# Altium PCB 载流板Ver0.1.PcbDoc (part 2 of 2)
Units mm, origin at the board's own origin, x right, y up, seen from the top; angles counter-clockwise.
Board outline 106 x 55 mm, 2 copper layers (Top Layer, Bottom Layer), stack 2.04 mm thick; 1 components, 4 nets, 8 pads, 2860 vias.
Unrouted connection lines stored in the file: 7.
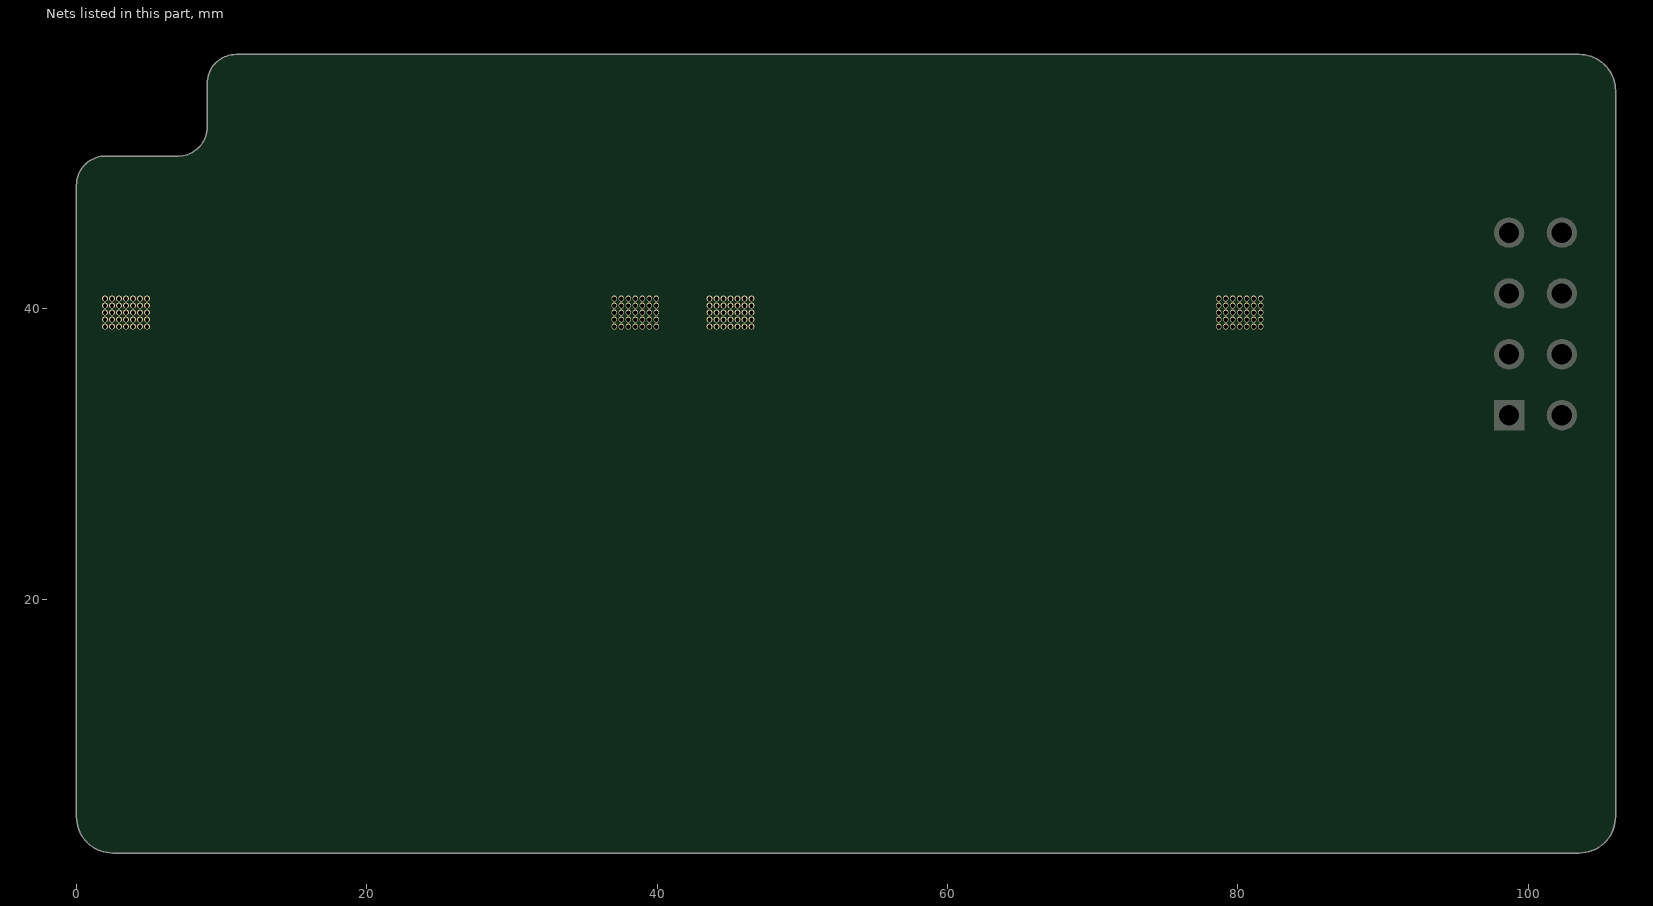
[diagram p2: the nets of this part, all layers, seen from the top]

## Via types
v1: diameter 0.4, hole 0.3, Top Layer to Bottom Layer, tented both sides, 2860 vias

## Nets (pads, with @x,y where several pads share a name; then routed paths per layer and width w, separated by ;. In a path a pad name is that pad's centre, name@x,y a point inside that pad or via, vN(x,y) a via of type N, cw(c..) or ccw(c..) an arc to the next point about the centre after c; other vN are vias at no path point) (continued)
X: 
  other v1: 1.97,38.76 2.453,38.76 2.936,38.76 3.418,38.76 3.901,38.76 4.383,38.76 4.866,38.76 37.048,38.76 37.53,38.76 38.013,38.76 38.496,38.76 38.978,38.76 39.461,38.76 39.943,38.76 43.601,38.76 43.601,38.76 44.084,38.76 44.084,38.76 44.084,38.76 44.084,38.76 44.084,38.76 44.084,38.76 44.566,38.76 44.566,38.76 44.566,38.76 44.566,38.76 44.566,38.76 44.566,38.76 45.049,38.76 45.049,38.76 45.049,38.76 45.049,38.76 45.049,38.76 45.049,38.76 45.531,38.76 45.531,38.76 45.531,38.76 45.531,38.76 45.531,38.76 45.531,38.76 46.014,38.76 46.014,38.76 46.014,38.76 46.014,38.76 46.014,38.76 46.014,38.76 46.497,38.76 46.497,38.76 46.497,38.76 46.497,38.76 78.678,38.76 78.678,38.76 78.678,38.76 78.678,38.76 79.161,38.76 79.161,38.76 79.161,38.76 79.161,38.76 79.161,38.76 79.161,38.76 79.644,38.76 79.644,38.76 79.644,38.76 79.644,38.76 79.644,38.76 79.644,38.76 80.126,38.76 80.126,38.76 80.126,38.76 80.126,38.76 80.126,38.76 80.126,38.76 80.609,38.76 80.609,38.76 80.609,38.76 80.609,38.76 80.609,38.76 80.609,38.76 81.091,38.76 81.091,38.76 81.091,38.76 81.091,38.76 81.091,38.76 81.091,38.76 81.574,38.76 81.574,38.76 1.97,39.243 2.453,39.243 2.936,39.243 3.418,39.243 3.901,39.243 4.383,39.243 4.866,39.243 37.048,39.243 37.53,39.243 38.013,39.243 38.496,39.243 38.978,39.243 39.461,39.243 39.943,39.243 43.601,39.243 43.601,39.243 43.601,39.243 43.601,39.243 44.084,39.243 44.084,39.243 44.084,39.243 44.084,39.243 44.084,39.243 44.084,39.243 44.084,39.243 44.084,39.243 44.084,39.243 44.084,39.243 44.084,39.243 44.084,39.243 44.566,39.243 44.566,39.243 44.566,39.243 44.566,39.243 44.566,39.243 44.566,39.243 44.566,39.243 44.566,39.243 44.566,39.243 44.566,39.243 44.566,39.243 44.566,39.243 45.049,39.243 45.049,39.243 45.049,39.243 45.049,39.243 45.049,39.243 45.049,39.243 45.049,39.243 45.049,39.243 45.049,39.243 45.049,39.243 45.049,39.243 45.049,39.243 45.531,39.243 45.531,39.243 45.531,39.243 45.531,39.243 45.531,39.243 45.531,39.243 45.531,39.243 45.531,39.243 45.531,39.243 45.531,39.243 45.531,39.243 45.531,39.243 46.014,39.243 46.014,39.243 46.014,39.243 46.014,39.243 46.014,39.243 46.014,39.243 46.014,39.243 46.014,39.243 46.014,39.243 46.014,39.243 46.014,39.243 46.014,39.243 46.497,39.243 46.497,39.243 46.497,39.243 46.497,39.243 46.497,39.243 46.497,39.243 46.497,39.243 46.497,39.243 78.678,39.243 78.678,39.243 78.678,39.243 78.678,39.243 78.678,39.243 78.678,39.243 78.678,39.243 78.678,39.243 79.161,39.243 79.161,39.243 79.161,39.243 79.161,39.243 79.161,39.243 79.161,39.243 79.161,39.243 79.161,39.243 79.161,39.243 79.161,39.243 79.161,39.243 79.161,39.243 79.644,39.243 79.644,39.243 79.644,39.243 79.644,39.243 79.644,39.243 79.644,39.243 79.644,39.243 79.644,39.243 79.644,39.243 79.644,39.243 79.644,39.243 79.644,39.243 80.126,39.243 80.126,39.243 80.126,39.243 80.126,39.243 80.126,39.243 80.126,39.243 80.126,39.243 80.126,39.243 80.126,39.243 80.126,39.243 80.126,39.243 80.126,39.243 80.609,39.243 80.609,39.243 80.609,39.243 80.609,39.243 80.609,39.243 80.609,39.243 80.609,39.243 80.609,39.243 80.609,39.243 80.609,39.243 80.609,39.243 80.609,39.243 81.091,39.243 81.091,39.243 81.091,39.243 81.091,39.243 81.091,39.243 81.091,39.243 81.091,39.243 81.091,39.243 81.091,39.243 81.091,39.243 81.091,39.243 81.091,39.243 81.574,39.243 81.574,39.243 81.574,39.243 81.574,39.243 1.97,39.725 2.453,39.725 2.936,39.725 3.418,39.725 3.901,39.725 4.383,39.725 4.866,39.725 37.048,39.725 37.53,39.725 38.013,39.725 38.496,39.725 38.978,39.725 39.461,39.725 39.943,39.725 43.601,39.725 43.601,39.725 43.601,39.725 43.601,39.725 44.084,39.725 44.084,39.725 44.084,39.725 44.084,39.725 44.084,39.725 44.084,39.725 44.084,39.725 44.084,39.725 44.084,39.725 44.084,39.725 44.084,39.725 44.084,39.725 44.566,39.725 44.566,39.725 44.566,39.725 44.566,39.725 44.566,39.725 44.566,39.725 44.566,39.725 44.566,39.725 44.566,39.725 44.566,39.725 44.566,39.725 44.566,39.725 45.049,39.725 45.049,39.725 45.049,39.725 45.049,39.725 45.049,39.725 45.049,39.725 45.049,39.725 45.049,39.725 45.049,39.725 45.049,39.725 45.049,39.725 45.049,39.725 45.531,39.725 45.531,39.725 45.531,39.725 45.531,39.725 45.531,39.725 45.531,39.725 45.531,39.725 45.531,39.725 45.531,39.725 45.531,39.725 45.531,39.725 45.531,39.725 46.014,39.725 46.014,39.725 46.014,39.725 46.014,39.725 46.014,39.725 46.014,39.725 46.014,39.725 46.014,39.725 46.014,39.725 46.014,39.725 46.014,39.725 46.014,39.725 46.497,39.725 46.497,39.725 46.497,39.725 46.497,39.725 46.497,39.725 46.497,39.725 46.497,39.725 46.497,39.725 78.678,39.725 78.678,39.725 78.678,39.725 78.678,39.725 78.678,39.725 78.678,39.725 78.678,39.725 78.678,39.725 79.161,39.725 79.161,39.725 79.161,39.725 79.161,39.725 79.161,39.725 79.161,39.725 79.161,39.725 79.161,39.725 79.161,39.725 79.161,39.725 79.161,39.725 79.161,39.725 79.644,39.725 79.644,39.725 79.644,39.725 79.644,39.725 79.644,39.725 79.644,39.725 79.644,39.725 79.644,39.725 79.644,39.725 79.644,39.725 79.644,39.725 79.644,39.725 80.126,39.725 80.126,39.725 80.126,39.725 80.126,39.725 80.126,39.725 80.126,39.725 80.126,39.725 80.126,39.725 80.126,39.725 80.126,39.725 80.126,39.725 80.126,39.725 80.609,39.725 80.609,39.725 80.609,39.725 80.609,39.725 80.609,39.725 80.609,39.725 80.609,39.725 80.609,39.725 80.609,39.725 80.609,39.725 80.609,39.725 80.609,39.725 81.091,39.725 81.091,39.725 81.091,39.725 81.091,39.725 81.091,39.725 81.091,39.725 81.091,39.725 81.091,39.725 81.091,39.725 81.091,39.725 81.091,39.725 81.091,39.725 81.574,39.725 81.574,39.725 81.574,39.725 81.574,39.725 1.97,40.208 2.453,40.208 2.936,40.208 3.418,40.208 3.901,40.208 4.383,40.208 4.866,40.208 37.048,40.208 37.53,40.208 38.013,40.208 38.496,40.208 38.978,40.208 39.461,40.208 39.943,40.208 43.601,40.208 43.601,40.208 43.601,40.208 43.601,40.208 44.084,40.208 44.084,40.208 44.084,40.208 44.084,40.208 44.084,40.208 44.084,40.208 44.084,40.208 44.084,40.208 44.084,40.208 44.084,40.208 44.084,40.208 44.084,40.208 44.566,40.208 44.566,40.208 44.566,40.208 44.566,40.208 44.566,40.208 44.566,40.208 44.566,40.208 44.566,40.208 44.566,40.208 44.566,40.208 44.566,40.208 44.566,40.208 45.049,40.208 45.049,40.208 45.049,40.208 45.049,40.208 45.049,40.208 45.049,40.208 45.049,40.208 45.049,40.208 45.049,40.208 45.049,40.208 45.049,40.208 45.049,40.208 45.531,40.208 45.531,40.208 45.531,40.208 45.531,40.208 45.531,40.208 45.531,40.208 45.531,40.208 45.531,40.208 45.531,40.208 45.531,40.208 45.531,40.208 45.531,40.208 46.014,40.208 46.014,40.208 46.014,40.208 46.014,40.208 46.014,40.208 46.014,40.208 46.014,40.208 46.014,40.208 46.014,40.208 46.014,40.208 46.014,40.208 46.014,40.208 46.497,40.208 46.497,40.208 46.497,40.208 46.497,40.208 46.497,40.208 46.497,40.208 46.497,40.208 46.497,40.208 78.678,40.208 78.678,40.208 78.678,40.208 78.678,40.208 78.678,40.208 78.678,40.208 78.678,40.208 78.678,40.208 79.161,40.208 79.161,40.208 79.161,40.208 79.161,40.208 79.161,40.208 79.161,40.208 79.161,40.208 79.161,40.208 79.161,40.208 79.161,40.208 79.161,40.208 79.161,40.208 79.644,40.208 79.644,40.208 79.644,40.208 79.644,40.208 79.644,40.208 79.644,40.208 79.644,40.208 79.644,40.208 79.644,40.208 79.644,40.208 79.644,40.208 79.644,40.208 80.126,40.208 80.126,40.208 80.126,40.208 80.126,40.208 80.126,40.208 80.126,40.208 80.126,40.208 80.126,40.208 80.126,40.208 80.126,40.208 80.126,40.208 80.126,40.208 80.609,40.208 80.609,40.208 80.609,40.208 80.609,40.208 80.609,40.208 80.609,40.208 80.609,40.208 80.609,40.208 80.609,40.208 80.609,40.208 80.609,40.208 80.609,40.208 81.091,40.208 81.091,40.208 81.091,40.208 81.091,40.208 81.091,40.208 81.091,40.208 81.091,40.208 81.091,40.208 81.091,40.208 81.091,40.208 81.091,40.208 81.091,40.208 81.574,40.208 81.574,40.208 81.574,40.208 81.574,40.208 1.97,40.69 2.453,40.69 2.936,40.69 3.418,40.69 3.901,40.69 4.383,40.69 4.866,40.69 37.048,40.69 37.53,40.69 38.013,40.69 38.496,40.69 38.978,40.69 39.461,40.69 39.943,40.69 43.601,40.69 43.601,40.69 44.084,40.69 44.084,40.69 44.084,40.69 44.084,40.69 44.084,40.69 44.084,40.69 44.566,40.69 44.566,40.69 44.566,40.69 44.566,40.69 44.566,40.69 44.566,40.69 45.049,40.69 45.049,40.69 45.049,40.69 45.049,40.69 45.049,40.69 45.049,40.69 45.531,40.69 45.531,40.69 45.531,40.69 45.531,40.69 45.531,40.69 45.531,40.69 46.014,40.69 46.014,40.69 46.014,40.69 46.014,40.69 46.014,40.69 46.014,40.69 46.497,40.69 46.497,40.69 46.497,40.69 46.497,40.69 78.678,40.69 78.678,40.69 78.678,40.69 78.678,40.69 79.161,40.69 79.161,40.69 79.161,40.69 79.161,40.69 79.161,40.69 79.161,40.69 79.644,40.69 79.644,40.69 79.644,40.69 79.644,40.69 79.644,40.69 79.644,40.69 80.126,40.69 80.126,40.69 80.126,40.69 80.126,40.69 80.126,40.69 80.126,40.69 80.609,40.69 80.609,40.69 80.609,40.69 80.609,40.69 80.609,40.69 80.609,40.69 81.091,40.69 81.091,40.69 81.091,40.69 81.091,40.69 81.091,40.69 81.091,40.69 81.574,40.69 81.574,40.69
copper on no net:
  other v1: 0.65,22.529 1.615,22.529 2.58,22.529 3.545,22.529 4.51,22.529 5.476,22.529 36.445,22.529 37.41,22.529 38.376,22.529 39.341,22.529 40.306,22.529 41.271,22.529 42.286,22.529 43.252,22.529 43.252,22.529 44.217,22.529 44.217,22.529 45.182,22.529 45.182,22.529 46.147,22.529 46.147,22.529 47.112,22.529 78.084,22.529 79.049,22.529 80.015,22.529 80.98,22.529 81.945,22.529 82.91,22.529 1.132,23.012 2.097,23.012 3.063,23.012 4.028,23.012 4.993,23.012 36.928,23.012 37.893,23.012 38.858,23.012 39.823,23.012 40.789,23.012 42.769,23.012 43.734,23.012 44.699,23.012 45.665,23.012 46.63,23.012 78.567,23.012 79.532,23.012 80.497,23.012 81.462,23.012 82.428,23.012 0.65,23.495 1.615,23.495 2.58,23.495 3.545,23.495 4.51,23.495 5.476,23.495 36.445,23.495 37.41,23.495 38.376,23.495 39.341,23.495 40.306,23.495 41.271,23.495 42.286,23.495 42.286,23.495 43.252,23.495 43.252,23.495 43.252,23.495 43.252,23.495 44.217,23.495 44.217,23.495 44.217,23.495 44.217,23.495 45.182,23.495 45.182,23.495 45.182,23.495 45.182,23.495 46.147,23.495 46.147,23.495 46.147,23.495 46.147,23.495 47.112,23.495 47.112,23.495 78.084,23.495 79.049,23.495 80.015,23.495 80.98,23.495 81.945,23.495 82.91,23.495 1.132,23.977 2.097,23.977 3.063,23.977 4.028,23.977 4.993,23.977 36.928,23.977 37.893,23.977 38.858,23.977 39.823,23.977 40.789,23.977 42.769,23.977 43.734,23.977 44.699,23.977 45.665,23.977 46.63,23.977 78.567,23.977 79.532,23.977 80.497,23.977 81.462,23.977 82.428,23.977 0.65,24.46 1.615,24.46 2.58,24.46 3.545,24.46 4.51,24.46 5.476,24.46 36.445,24.46 37.41,24.46 38.376,24.46 39.341,24.46 40.306,24.46 41.271,24.46 42.286,24.46 42.286,24.46 43.252,24.46 43.252,24.46 43.252,24.46 43.252,24.46 44.217,24.46 44.217,24.46 44.217,24.46 44.217,24.46 45.182,24.46 45.182,24.46 45.182,24.46 45.182,24.46 46.147,24.46 46.147,24.46 46.147,24.46 46.147,24.46 47.112,24.46 47.112,24.46 78.084,24.46 79.049,24.46 80.015,24.46 80.98,24.46 81.945,24.46 82.91,24.46 1.132,24.942 2.097,24.942 3.063,24.942 4.028,24.942 4.993,24.942 36.928,24.942 37.893,24.942 38.858,24.942 39.823,24.942 40.789,24.942 42.769,24.942 43.734,24.942 44.699,24.942 45.665,24.942 46.63,24.942 78.567,24.942 79.532,24.942 80.497,24.942 81.462,24.942 82.428,24.942 0.65,25.425 1.615,25.425 2.58,25.425 3.545,25.425 4.51,25.425 5.476,25.425 36.445,25.425 37.41,25.425 38.376,25.425 39.341,25.425 40.306,25.425 41.271,25.425 42.286,25.425 42.286,25.425 43.252,25.425 43.252,25.425 43.252,25.425 43.252,25.425 44.217,25.425 44.217,25.425 44.217,25.425 44.217,25.425 45.182,25.425 45.182,25.425 45.182,25.425 45.182,25.425 46.147,25.425 46.147,25.425 46.147,25.425 46.147,25.425 47.112,25.425 47.112,25.425 78.084,25.425 79.049,25.425 80.015,25.425 80.98,25.425 81.945,25.425 82.91,25.425 1.132,25.908 2.097,25.908 3.063,25.908 4.028,25.908 4.993,25.908 36.928,25.908 37.893,25.908 38.858,25.908 39.823,25.908 40.789,25.908 42.769,25.908 43.734,25.908 44.699,25.908 45.665,25.908 46.63,25.908 78.567,25.908 79.532,25.908 80.497,25.908 81.462,25.908 82.428,25.908 0.65,26.39 1.615,26.39 2.58,26.39 3.545,26.39 4.51,26.39 5.476,26.39 36.445,26.39 37.41,26.39 38.376,26.39 39.341,26.39 40.306,26.39 41.271,26.39 42.286,26.39 42.286,26.39 43.252,26.39 43.252,26.39 43.252,26.39 43.252,26.39 44.217,26.39 44.217,26.39 44.217,26.39 44.217,26.39 45.182,26.39 45.182,26.39 45.182,26.39 45.182,26.39 46.147,26.39 46.147,26.39 46.147,26.39 46.147,26.39 47.112,26.39 47.112,26.39 78.084,26.39 79.049,26.39 80.015,26.39 80.98,26.39 81.945,26.39 82.91,26.39 1.132,26.873 2.097,26.873 3.063,26.873 4.028,26.873 4.993,26.873 36.928,26.873 37.893,26.873 38.858,26.873 39.823,26.873 40.789,26.873 42.769,26.873 43.734,26.873 44.699,26.873 45.665,26.873 46.63,26.873 78.567,26.873 79.532,26.873 80.497,26.873 81.462,26.873 82.428,26.873 0.65,27.355 1.615,27.355 2.58,27.355 3.545,27.355 4.51,27.355 5.476,27.355 36.445,27.355 37.41,27.355 38.376,27.355 39.341,27.355 40.306,27.355 41.271,27.355 42.286,27.355 42.286,27.355 43.252,27.355 43.252,27.355 43.252,27.355 43.252,27.355 44.217,27.355 44.217,27.355 44.217,27.355 44.217,27.355 45.182,27.355 45.182,27.355 45.182,27.355 45.182,27.355 46.147,27.355 46.147,27.355 46.147,27.355 46.147,27.355 47.112,27.355 47.112,27.355 78.084,27.355 79.049,27.355 80.015,27.355 80.98,27.355 81.945,27.355 82.91,27.355 1.132,27.838 2.097,27.838 3.063,27.838 4.028,27.838 4.993,27.838 36.928,27.838 37.893,27.838 38.858,27.838 39.823,27.838 40.789,27.838 42.769,27.838 43.734,27.838 44.699,27.838 45.665,27.838 46.63,27.838 78.567,27.838 79.532,27.838 80.497,27.838 81.462,27.838 82.428,27.838 0.65,28.321 1.615,28.321 2.58,28.321 3.545,28.321 4.51,28.321 5.476,28.321 36.445,28.321 37.41,28.321 38.376,28.321 39.341,28.321 40.306,28.321 41.271,28.321 42.286,28.321 42.286,28.321 43.252,28.321 43.252,28.321 43.252,28.321 43.252,28.321 44.217,28.321 44.217,28.321 44.217,28.321 44.217,28.321 45.182,28.321 45.182,28.321 45.182,28.321 45.182,28.321 46.147,28.321 46.147,28.321 46.147,28.321 46.147,28.321 47.112,28.321 47.112,28.321 78.084,28.321 79.049,28.321 80.015,28.321 80.98,28.321 81.945,28.321 82.91,28.321 1.132,28.803 2.097,28.803 3.063,28.803 4.028,28.803 4.993,28.803 36.928,28.803 37.893,28.803 38.858,28.803 39.823,28.803 40.789,28.803 42.769,28.803 43.734,28.803 44.699,28.803 45.665,28.803 46.63,28.803 78.567,28.803 79.532,28.803 80.497,28.803 81.462,28.803 82.428,28.803 0.65,29.286 1.615,29.286 2.58,29.286 3.545,29.286 4.51,29.286 5.476,29.286 36.445,29.286 37.41,29.286 38.376,29.286 39.341,29.286 40.306,29.286 41.271,29.286 42.286,29.286 42.286,29.286 43.252,29.286 43.252,29.286 43.252,29.286 43.252,29.286 44.217,29.286 44.217,29.286 44.217,29.286 44.217,29.286 45.182,29.286 45.182,29.286 45.182,29.286 45.182,29.286 46.147,29.286 46.147,29.286 46.147,29.286 46.147,29.286 47.112,29.286 47.112,29.286 78.084,29.286 79.049,29.286 80.015,29.286 80.98,29.286 81.945,29.286 82.91,29.286 1.132,29.768 2.097,29.768 3.063,29.768 4.028,29.768 4.993,29.768 36.928,29.768 37.893,29.768 38.858,29.768 39.823,29.768 40.789,29.768 42.769,29.768 43.734,29.768 44.699,29.768 45.665,29.768 46.63,29.768 78.567,29.768 79.532,29.768 80.497,29.768 81.462,29.768 82.428,29.768 0.65,30.251 1.615,30.251 2.58,30.251 3.545,30.251 4.51,30.251 5.476,30.251 36.445,30.251 37.41,30.251 38.376,30.251 39.341,30.251 40.306,30.251 41.271,30.251 42.286,30.251 42.286,30.251 43.252,30.251 43.252,30.251 43.252,30.251 43.252,30.251 44.217,30.251 44.217,30.251 44.217,30.251 44.217,30.251 45.182,30.251 45.182,30.251 45.182,30.251 45.182,30.251 46.147,30.251 46.147,30.251 46.147,30.251 46.147,30.251 47.112,30.251 47.112,30.251 78.084,30.251 79.049,30.251 80.015,30.251 80.98,30.251 81.945,30.251 82.91,30.251 1.132,30.734 2.097,30.734 3.063,30.734 4.028,30.734 4.993,30.734 36.928,30.734 37.893,30.734 38.858,30.734 39.823,30.734 40.789,30.734 42.769,30.734 43.734,30.734 44.699,30.734 45.665,30.734 46.63,30.734 78.567,30.734 79.532,30.734 80.497,30.734 81.462,30.734 82.428,30.734 0.65,31.216 1.615,31.216 2.58,31.216 3.545,31.216 4.51,31.216 5.476,31.216 36.445,31.216 37.41,31.216 38.376,31.216 39.341,31.216 40.306,31.216 41.271,31.216 42.286,31.216 42.286,31.216 43.252,31.216 43.252,31.216 43.252,31.216 43.252,31.216 44.217,31.216 44.217,31.216 44.217,31.216 44.217,31.216 45.182,31.216 45.182,31.216 45.182,31.216 45.182,31.216 46.147,31.216 46.147,31.216 46.147,31.216 46.147,31.216 47.112,31.216 47.112,31.216 78.084,31.216 79.049,31.216 80.015,31.216 80.98,31.216 81.945,31.216 82.91,31.216 1.132,31.699 2.097,31.699 3.063,31.699 4.028,31.699 4.993,31.699 36.928,31.699 37.893,31.699 38.858,31.699 39.823,31.699 40.789,31.699 42.769,31.699 43.734,31.699 44.699,31.699 45.665,31.699 46.63,31.699 78.567,31.699 79.532,31.699 80.497,31.699 81.462,31.699 82.428,31.699 1.615,32.181 2.58,32.181 3.545,32.181 4.51,32.181 5.476,32.181 36.445,32.181 37.41,32.181 38.376,32.181 39.341,32.181 40.306,32.181 43.252,32.181 43.252,32.181 43.252,32.181 43.252,32.181 44.217,32.181 44.217,32.181 44.217,32.181 44.217,32.181 45.182,32.181 45.182,32.181 45.182,32.181 45.182,32.181 46.147,32.181 46.147,32.181 46.147,32.181 46.147,32.181 47.112,32.181 47.112,32.181 78.084,32.181 79.049,32.181 80.015,32.181 80.98,32.181 81.945,32.181 2.097,32.664 3.063,32.664 4.028,32.664 4.993,32.664 36.928,32.664 37.893,32.664 38.858,32.664 39.823,32.664 43.734,32.664 44.699,32.664 45.665,32.664 46.63,32.664 78.567,32.664 79.532,32.664 80.497,32.664 81.462,32.664 1.615,33.147 2.58,33.147 3.545,33.147 4.51,33.147 5.476,33.147 36.445,33.147 37.41,33.147 38.376,33.147 39.341,33.147 40.306,33.147 43.252,33.147 43.252,33.147 43.252,33.147 43.252,33.147 44.217,33.147 44.217,33.147 44.217,33.147 44.217,33.147 45.182,33.147 45.182,33.147 45.182,33.147 45.182,33.147 46.147,33.147 46.147,33.147 46.147,33.147 46.147,33.147 47.112,33.147 47.112,33.147 78.084,33.147 79.049,33.147 80.015,33.147 80.98,33.147 81.945,33.147 2.097,33.629 3.063,33.629 4.028,33.629 4.993,33.629 36.928,33.629 37.893,33.629 38.858,33.629 39.823,33.629 43.734,33.629 44.699,33.629 45.665,33.629 46.63,33.629 78.567,33.629 79.532,33.629 80.497,33.629 81.462,33.629 1.615,34.112 2.58,34.112 3.545,34.112 4.51,34.112 5.476,34.112 36.445,34.112 37.41,34.112 38.376,34.112 39.341,34.112 40.306,34.112 43.252,34.112 43.252,34.112 43.252,34.112 43.252,34.112 44.217,34.112 44.217,34.112 44.217,34.112 44.217,34.112 45.182,34.112 45.182,34.112 45.182,34.112 45.182,34.112 46.147,34.112 46.147,34.112 46.147,34.112 46.147,34.112 47.112,34.112 47.112,34.112 78.084,34.112 79.049,34.112 80.015,34.112 80.98,34.112 81.945,34.112 2.097,34.594 3.063,34.594 4.028,34.594 4.993,34.594 36.928,34.594 37.893,34.594 38.858,34.594 39.823,34.594 43.734,34.594 44.699,34.594 45.665,34.594 46.63,34.594 78.567,34.594 79.532,34.594 80.497,34.594 81.462,34.594 1.615,35.077 2.58,35.077 3.545,35.077 4.51,35.077 5.476,35.077 36.445,35.077 37.41,35.077 38.376,35.077 39.341,35.077 40.306,35.077 43.252,35.077 43.252,35.077 43.252,35.077 43.252,35.077 44.217,35.077 44.217,35.077 44.217,35.077 44.217,35.077 45.182,35.077 45.182,35.077 45.182,35.077 45.182,35.077 46.147,35.077 46.147,35.077 46.147,35.077 46.147,35.077 47.112,35.077 47.112,35.077 78.084,35.077 79.049,35.077 80.015,35.077 80.98,35.077 81.945,35.077 2.097,35.56 3.063,35.56 4.028,35.56 4.993,35.56 36.928,35.56 37.893,35.56 38.858,35.56 39.823,35.56 43.734,35.56 44.699,35.56 45.665,35.56 46.63,35.56 78.567,35.56 79.532,35.56 80.497,35.56 81.462,35.56 41.29,43.992 42.255,43.992 41.772,44.475 41.29,44.958 42.255,44.958

## Polygon pours and split planes (outlines as drawn)
VOUT12V on Top Layer "VOUT12V_L01_P029" (solid, pour order 29): 81.98,49.695 82.755,50.47 96.52,50.47 96.825,50.165 96.825,47.142 96.444,46.761 92.71,46.761 92.354,46.406 92.354,28.945 94.909,26.39 95.214,26.695 99.532,26.695 100.903,28.067 100.903,46.532 101.284,46.913 105.258,46.913 105.896,46.275 105.896,57.654 104.394,59.157 82.86,59.157 80.901,57.198 81.98,56.119
PGND on Top Layer "PGND_L01_P027" (solid, pour order 27): 6.415,45.288 5.679,44.551 5.679,36.271 6.288,35.661 6.288,20.116 6.542,19.862 7.584,19.862 7.787,19.659 7.787,15.951 7.495,15.659 6.53,15.659 6.339,15.468 6.339,13.309 7.402,12.247 34.74,12.247 35.671,13.177 35.671,15.463 35.676,15.468 35.486,15.659 34.431,15.659 34.13,15.96 34.13,19.417 34.446,19.733 49.042,19.733 49.473,19.303 49.473,16.048 49.083,15.659 48.084,15.659 47.885,15.46 47.885,13.216 48.855,12.247 76.27,12.247 77.258,13.234 77.258,15.416 77.053,15.621 76.07,15.621 75.732,15.958 75.732,19.597 76.048,19.913 77.002,19.913 77.258,20.169 77.258,35.757 77.789,36.289 77.789,44.754 77.256,45.288 47.64,45.288 47.233,44.881 47.233,36.211 47.939,35.505 47.939,21.748 47.944,21.742 47.64,21.437 36.057,21.437 35.607,21.887 35.607,35.659 36.159,36.211 36.159,44.881 35.752,45.288
X on Top Layer "X_L01_P024" (solid, pour order 24): 82.971,43.027 83.215,42.783 83.215,38.928 82.793,38.506 78.526,38.506 78.17,38.862 78.17,40.64 78.45,40.919 81.599,40.919 81.803,41.122 81.803,42.799 82.031,43.027
X on Top Layer "X_L01_P023" (solid, pour order 23): 41.34,43.027 41.584,42.783 41.584,38.928 41.163,38.506 36.895,38.506 36.54,38.862 36.54,40.64 36.819,40.919 39.969,40.919 40.172,41.122 40.172,42.799 40.401,43.027
X on Top Layer "X_L01_P022" (solid, pour order 22): 42.204,43.027 41.96,42.783 41.96,38.928 42.382,38.506 46.649,38.506 47.005,38.862 47.005,40.64 46.725,40.919 43.576,40.919 43.372,41.122 43.372,42.799 43.144,43.027
VOUT12V on Top Layer "VOUT12V_L01_P019" (solid, pour order 19): 0.006,58.005 1.335,59.334 79.161,59.334 81.98,56.515 81.98,45.542 81.726,45.288 78.297,45.288 78.043,45.542 47.132,45.542 46.878,45.288 43.423,45.288 43.169,45.542 40.375,45.542 40.375,45.516 40.147,45.288 36.667,45.288 36.413,45.542 36.413,45.567 5.501,45.567 5.222,45.288 0.624,45.288 0.006,45.906
PGND on Top Layer "PGND_L01_P018" (solid, pour order 18): 47.359,38.851 46.836,38.328 36.604,38.328 36.025,38.907 35.905,38.787 35.905,36.465 36.159,36.211 47.233,36.211 47.7,36.677 47.741,36.677 47.741,38.469
VBUS on Top Layer "VBUS_L01_P016" (solid, pour order 16): 86.08,43.22 86.308,43.449 86.308,46.599 86.791,47.081 96.189,47.081 96.468,47.361 96.468,49.85 96.113,50.205 82.93,50.205 82.295,49.57 82.295,44.008 83.083,43.22
VBUS on Top Layer "VBUS_L01_P008" (solid, pour order 8): 82.996,43.307 83.693,42.61 83.693,20.594 82.476,19.378 83.012,18.842 83.012,14.554 82.843,14.385 81.812,14.385 81.564,14.137 81.564,13.106 81.793,12.877 82.844,12.877 83.012,12.71 83.012,3.393 82.235,2.616 92.913,2.616 94.107,3.81 94.107,26.421 91.947,28.581 91.947,47.802 91.305,47.16 86.849,47.16 86.258,46.568 86.258,43.84 85.725,43.307
VOUT12V on Top Layer "VOUT12V_L01_P010" (solid, pour order 10): 94.909,22.058 94.909,5.08 95.163,4.826 105.664,4.826 106.299,5.461 106.299,21.659 105.635,22.323 104.495,21.183 95.784,21.183
X on Top Layer "X_L01_P002" (solid, pour order 2): 0.573,43.027 0.33,42.783 0.33,38.928 0.751,38.506 5.018,38.506 5.374,38.862 5.374,40.64 5.095,40.919 1.945,40.919 1.742,41.122 1.742,42.799 1.513,43.027
VBUS on Top Layer "VBUS_L01_P001" (solid, pour order 1): 1.996,13.106 1.767,12.877 0.396,12.877 0.006,12.488 0.006,3.945 1.445,2.506 82.125,2.506 83.012,3.393 83.012,12.71 82.844,12.877 81.793,12.877 81.564,13.106 81.335,12.877 77.652,12.877 77.475,13.055 76.437,12.018 48.76,12.018 47.722,13.055 47.544,12.877 43.861,12.877 43.633,13.106 43.633,12.299 43.351,12.018 40.194,12.018 39.925,12.286 39.925,13.106 39.696,12.877 36.013,12.877 35.836,13.055 35.658,12.877 34.798,12.018 7.123,12.018 6.085,13.055 5.907,12.877 2.224,12.877
no net on Top Solder "VBUS_L01_P015" (solid): 86.095,43.205 86.324,43.434 86.324,46.583 86.806,47.066 96.204,47.066 96.484,47.345 96.484,49.834 96.128,50.19 82.946,50.19 82.311,49.555 82.311,43.992 83.098,43.205
no net on Top Solder "NETL3_1_L04_P003" (solid): 42.204,43.027 41.96,42.783 41.96,38.928 42.382,38.506 46.649,38.506 47.005,38.862 47.005,40.64 46.725,40.919 43.576,40.919 43.372,41.122 43.372,42.799 43.144,43.027
no net on Top Solder "NETL1_2_L04_P005" (solid): 41.34,43.027 41.584,42.783 41.584,38.928 41.163,38.506 36.895,38.506 36.54,38.862 36.54,40.64 36.819,40.919 39.969,40.919 40.172,41.122 40.172,42.799 40.401,43.027
no net on Top Solder "VBUS_L04_P030" (solid): 1.996,13.106 1.767,12.877 0.396,12.877 -1.027,11.455 -1.027,6.781 83.012,6.781 83.012,12.71 82.844,12.877 81.793,12.877 81.564,13.106 81.335,12.877 77.652,12.877 77.475,13.055 76.437,12.018 48.76,12.018 47.722,13.055 47.544,12.877 43.861,12.877 43.633,13.106 43.633,12.299 43.351,12.018 40.194,12.018 39.925,12.286 39.925,13.106 39.696,12.877 36.013,12.877 35.836,13.055 35.658,12.877 34.798,12.018 7.123,12.018 6.085,13.055 5.907,12.877 2.224,12.877
no net on Top Solder "NETL2_1_L04_P053" (solid): 0.573,43.027 0.33,42.783 0.33,38.928 0.751,38.506 5.018,38.506 5.374,38.862 5.374,40.64 5.095,40.919 1.945,40.919 1.742,41.122 1.742,42.799 1.513,43.027
no net on Top Solder "NETL4_2_L04_P007" (solid): 82.971,43.027 83.215,42.783 83.215,38.928 82.793,38.506 78.526,38.506 78.17,38.862 78.17,40.64 78.45,40.919 81.599,40.919 81.803,41.122 81.803,42.799 82.031,43.027
VOUT12V on Bottom Layer "VOUT12V_L02_P000" (solid, pour order 0): 0.006,58.005 1.335,59.334 79.161,59.334 81.98,56.515 81.98,45.542 81.726,45.288 78.297,45.288 78.043,45.542 47.132,45.542 46.878,45.288 43.423,45.288 43.169,45.542 40.375,45.542 40.375,45.516 40.147,45.288 36.667,45.288 36.413,45.542 36.413,45.567 5.501,45.567 5.222,45.288 0.624,45.288 0.006,45.906
VOUT12V on Bottom Layer "VOUT12V_L02_P026" (solid, pour order 26): 94.909,22.058 94.909,5.08 95.163,4.826 105.664,4.826 106.299,5.461 106.299,21.659 105.635,22.323 104.495,21.183 95.784,21.183
VOUT12V on Bottom Layer "VOUT12V_L02_P017" (solid, pour order 17): 81.98,49.695 82.755,50.47 96.52,50.47 96.825,50.165 96.825,47.142 96.444,46.761 92.71,46.761 92.354,46.406 92.354,28.945 94.909,26.39 95.214,26.695 99.532,26.695 100.903,28.067 100.903,46.532 101.284,46.913 105.258,46.913 105.896,46.275 105.896,57.654 104.394,59.157 82.86,59.157 80.901,57.198 81.98,56.119
VBUS on Bottom Layer "VBUS_L02_P028" (solid, pour order 28): 86.08,43.22 86.308,43.449 86.308,46.599 86.791,47.081 96.189,47.081 96.468,47.361 96.468,49.85 96.113,50.205 82.93,50.205 82.295,49.57 82.295,44.008 83.083,43.22
X on Bottom Layer "X_L02_P003" (solid, pour order 3): 42.204,43.027 41.96,42.783 41.96,38.928 42.382,38.506 46.649,38.506 47.005,38.862 47.005,40.64 46.725,40.919 43.576,40.919 43.372,41.122 43.372,42.799 43.144,43.027
X on Bottom Layer "X_L02_P005" (solid, pour order 5): 82.971,43.027 83.215,42.783 83.215,38.928 82.793,38.506 78.526,38.506 78.17,38.862 78.17,40.64 78.45,40.919 81.599,40.919 81.803,41.122 81.803,42.799 82.031,43.027
X on Bottom Layer "X_L02_P021" (solid, pour order 21): 0.573,43.027 0.33,42.783 0.33,38.928 0.751,38.506 5.018,38.506 5.374,38.862 5.374,40.64 5.095,40.919 1.945,40.919 1.742,41.122 1.742,42.799 1.513,43.027
X on Bottom Layer "X_L02_P004" (solid, pour order 4): 41.34,43.027 41.584,42.783 41.584,38.928 41.163,38.506 36.895,38.506 36.54,38.862 36.54,40.64 36.819,40.919 39.969,40.919 40.172,41.122 40.172,42.799 40.401,43.027
PGND on Bottom Layer "PGND_L02_P030" (solid, pour order 30): 47.359,38.851 46.836,38.328 36.604,38.328 36.025,38.907 35.905,38.787 35.905,36.465 36.159,36.211 47.233,36.211 47.7,36.677 47.741,36.677 47.741,38.469
PGND on Bottom Layer "PGND_L02_P013" (solid, pour order 13): 6.415,45.288 5.679,44.551 5.679,36.271 6.288,35.661 6.288,20.116 6.542,19.862 7.584,19.862 7.787,19.659 7.787,15.951 7.495,15.659 6.53,15.659 6.339,15.468 6.339,13.309 7.402,12.247 34.74,12.247 35.671,13.177 35.671,15.463 35.676,15.468 35.486,15.659 34.431,15.659 34.13,15.96 34.13,19.417 34.446,19.733 49.042,19.733 49.473,19.303 49.473,16.048 49.083,15.659 48.084,15.659 47.885,15.46 47.885,13.216 48.855,12.247 76.27,12.247 77.258,13.234 77.258,15.416 77.053,15.621 76.07,15.621 75.732,15.958 75.732,19.597 76.048,19.913 77.002,19.913 77.258,20.169 77.258,35.757 77.789,36.289 77.789,44.754 77.256,45.288 47.64,45.288 47.233,44.881 47.233,36.211 47.939,35.505 47.939,21.748 47.944,21.742 47.64,21.437 36.057,21.437 35.607,21.887 35.607,35.659 36.159,36.211 36.159,44.881 35.752,45.288
VBUS on Bottom Layer "VBUS_L02_P025" (solid, pour order 25): 82.996,43.307 83.693,42.61 83.693,20.594 82.476,19.378 83.012,18.842 83.012,14.554 82.843,14.385 81.812,14.385 81.564,14.137 81.564,13.106 81.793,12.877 82.844,12.877 83.012,12.71 83.012,3.393 82.235,2.616 92.913,2.616 94.107,3.81 94.107,26.421 91.947,28.581 91.947,47.802 91.235,47.09 86.779,47.09 86.295,46.606 86.295,43.877 85.725,43.307
VBUS on Bottom Layer "VBUS_L02_P020" (solid, pour order 20): 1.996,13.106 1.767,12.877 0.396,12.877 0.006,12.488 0.006,3.945 1.445,2.506 82.125,2.506 83.012,3.393 83.012,12.71 82.844,12.877 81.793,12.877 81.564,13.106 81.335,12.877 77.652,12.877 77.475,13.055 76.437,12.018 48.76,12.018 47.722,13.055 47.544,12.877 43.861,12.877 43.633,13.106 43.633,12.299 43.351,12.018 40.194,12.018 39.925,12.286 39.925,13.106 39.696,12.877 36.013,12.877 35.836,13.055 35.658,12.877 34.798,12.018 7.123,12.018 6.085,13.055 5.907,12.877 2.224,12.877
VBUS on Bottom Solder "VBUS_L01_P015" (solid, pour order 15): 86.095,43.205 86.324,43.434 86.324,46.583 86.806,47.066 96.204,47.066 96.484,47.345 96.484,49.834 96.128,50.19 82.946,50.19 82.311,49.555 82.311,43.992 83.098,43.205
no net on Bottom Solder "VBUS_L01_P015" (solid): 86.095,43.205 86.324,43.434 86.324,46.583 86.806,47.066 96.204,47.066 96.484,47.345 96.484,49.834 96.128,50.19 82.946,50.19 82.311,49.555 82.311,43.992 83.098,43.205
no net on Bottom Solder "NETL1_2_L04_P005" (solid): 41.34,43.027 41.584,42.783 41.584,38.928 41.163,38.506 36.895,38.506 36.54,38.862 36.54,40.64 36.819,40.919 39.969,40.919 40.172,41.122 40.172,42.799 40.401,43.027
no net on Bottom Solder "NETL4_2_L04_P007" (solid): 82.971,43.027 83.215,42.783 83.215,38.928 82.793,38.506 78.526,38.506 78.17,38.862 78.17,40.64 78.45,40.919 81.599,40.919 81.803,41.122 81.803,42.799 82.031,43.027
no net on Bottom Solder "NETL2_1_L04_P053" (solid): 0.573,43.027 0.33,42.783 0.33,38.928 0.751,38.506 5.018,38.506 5.374,38.862 5.374,40.64 5.095,40.919 1.945,40.919 1.742,41.122 1.742,42.799 1.513,43.027
no net on Bottom Solder "NETL3_1_L04_P003" (solid): 42.204,43.027 41.96,42.783 41.96,38.928 42.382,38.506 46.649,38.506 47.005,38.862 47.005,40.64 46.725,40.919 43.576,40.919 43.372,41.122 43.372,42.799 43.144,43.027
no net on Bottom Solder "VBUS_L04_P030" (solid): 1.996,13.106 1.767,12.877 0.396,12.877 -1.027,11.455 -1.027,6.781 83.012,6.781 83.012,12.71 82.844,12.877 81.793,12.877 81.564,13.106 81.335,12.877 77.652,12.877 77.475,13.055 76.437,12.018 48.76,12.018 47.722,13.055 47.544,12.877 43.861,12.877 43.633,13.106 43.633,12.299 43.351,12.018 40.194,12.018 39.925,12.286 39.925,13.106 39.696,12.877 36.013,12.877 35.836,13.055 35.658,12.877 34.798,12.018 7.123,12.018 6.085,13.055 5.907,12.877 2.224,12.877

## Other copper
Top Layer:
  rectangle net PGND: 96.883,31.624 99.883,33.724
  rectangle net PGND: 96.883,35.814 99.883,37.914
  rectangle net PGND: 96.883,40.004 99.883,42.104
  rectangle net PGND: 96.886,44.194 99.883,46.294
  region: 42.444,35.966 42.013,35.534 42.013,21.92 42.317,21.615 47.157,21.615 47.55,22.008 47.55,35.433 47.016,35.966
  region: 41.52,35.534 41.52,21.947 41.188,21.615 37.149,21.615 36.26,21.615 35.981,21.894 35.981,35.431 36.516,35.966 41.088,35.966
  region net VBUS: 92.62,47.103 91.923,46.406 91.745,46.406 91.719,46.431 91.719,47.219 92.202,47.219 92.329,47.346
  region net VOUT12V: 95.53,21.183 94.909,21.804 94.909,26.39 95.214,26.695 99.532,26.695 100.903,28.067 100.903,46.532 101.284,46.913 105.526,46.913 105.896,46.543 105.896,22.061 105.018,21.183
  region net VOUT12V: 103.723,8.382 104.104,8.001 104.104,5.283 103.647,4.826 95.163,4.826 94.909,5.08 94.909,8.128 95.163,8.382
  region net PGND: 77.258,23.288 77.258,27.987 77.105,28.139 74.489,28.139 74.311,27.961 74.311,23.211 74.515,23.008 76.978,23.008
  region net PGND: 47.939,25.247 47.939,21.265 48.173,21.031 50.738,21.031 50.885,21.178 50.885,25.323 50.682,25.527 48.218,25.527
  region net PGND: 35.607,23.288 35.607,27.987 35.455,28.139 32.838,28.139 32.661,27.961 32.661,23.211 32.864,23.008 35.328,23.008
  region net PGND: 6.288,25.247 6.288,20.548 6.441,20.396 9.057,20.396 9.235,20.574 9.235,25.323 9.032,25.527 6.568,25.527
  region net VOUT12V: 95.315,16.56 94.985,16.23 94.985,13.309 95.29,13.004 103.697,13.004 104.104,13.411 104.104,16.129 103.672,16.56
  region: 0.808,35.966 0.376,35.534 0.376,21.92 0.655,21.64 1.773,21.64 1.976,21.437 1.976,20.39 2.199,20.167 5.704,20.167 5.913,20.376 5.913,35.433 5.38,35.966
  region: 83.159,35.534 83.159,21.92 83.159,20.448 82.878,20.167 79.296,20.167 79.068,20.396 79.068,21.336 78.788,21.615 77.849,21.615 77.62,21.844 77.62,35.431 78.155,35.966 82.727,35.966
  region net VBUS: 48.986,19.532 49.246,19.272 49.246,16.052 49.024,15.831 47.932,15.831 47.722,15.621 47.722,13.055 47.544,12.877 43.633,12.877 43.633,14.137 43.384,14.385 41.823,14.385 41.823,19.532 47.595,19.532
  region net VBUS: 76.103,19.685 75.951,19.532 75.951,16.052 76.172,15.831 77.264,15.831 77.475,15.621 77.475,13.055 77.652,12.877 81.335,12.877 81.564,13.106 81.564,14.137 81.812,14.385 82.843,14.385 83.012,14.554 83.012,19.151 82.631,19.532 77.602,19.532 77.449,19.685
  region net VBUS: 34.559,19.532 34.312,19.285 34.312,16.052 34.533,15.831 35.625,15.831 35.836,15.621 35.836,13.055 36.013,12.877 39.925,12.877 39.925,14.137 40.173,14.385 41.823,14.385 41.823,19.532 35.963,19.532
  region net VBUS: 7.457,19.685 7.609,19.532 7.609,16.052 7.388,15.831 6.295,15.831 6.085,15.621 6.085,13.055 5.907,12.877 2.224,12.877 1.996,13.106 1.996,14.137 1.748,14.385 0.717,14.385 0.548,14.554 0.548,19.151 0.929,19.532 5.958,19.532 6.111,19.685
Bottom Layer:
  region net VBUS: 92.62,47.103 91.923,46.406 91.745,46.406 91.719,46.431 91.719,47.219 92.202,47.219 92.329,47.346
  region net VOUT12V: 95.53,21.183 94.909,21.804 94.909,26.39 95.214,26.695 99.532,26.695 100.903,28.067 100.903,46.532 101.284,46.913 105.526,46.913 105.896,46.543 105.896,22.061 105.018,21.183
  region: 0.808,35.966 0.376,35.534 0.376,21.92 0.655,21.64 1.773,21.64 1.976,21.437 1.976,20.39 2.199,20.167 5.704,20.167 5.913,20.376 5.913,35.433 5.38,35.966
  region: 41.52,35.534 41.52,21.947 41.188,21.615 37.149,21.615 36.26,21.615 35.981,21.894 35.981,35.431 36.516,35.966 41.088,35.966
  region: 42.444,35.966 42.013,35.534 42.013,21.92 42.317,21.615 47.157,21.615 47.55,22.008 47.55,35.433 47.016,35.966
  region: 83.159,35.534 83.159,21.92 83.159,20.448 82.878,20.167 79.296,20.167 79.068,20.396 79.068,21.336 78.788,21.615 77.849,21.615 77.62,21.844 77.62,35.431 78.155,35.966 82.727,35.966
  region net VBUS: 7.457,19.685 7.609,19.532 7.609,16.052 7.388,15.831 6.295,15.831 6.085,15.621 6.085,13.055 5.907,12.877 2.224,12.877 1.996,13.106 1.996,14.137 1.748,14.385 0.717,14.385 0.548,14.554 0.548,19.151 0.929,19.532 5.958,19.532 6.111,19.685
  region net VBUS: 34.559,19.532 34.312,19.285 34.312,16.052 34.533,15.831 35.625,15.831 35.836,15.621 35.836,13.055 36.013,12.877 39.925,12.877 39.925,14.137 40.173,14.385 41.823,14.385 41.823,19.532 35.963,19.532
  region net VBUS: 48.986,19.532 49.246,19.272 49.246,16.052 49.024,15.831 47.932,15.831 47.722,15.621 47.722,13.055 47.544,12.877 43.633,12.877 43.633,14.137 43.384,14.385 41.823,14.385 41.823,19.532 47.595,19.532
  region net VBUS: 76.103,19.685 75.951,19.532 75.951,16.052 76.172,15.831 77.264,15.831 77.475,15.621 77.475,13.055 77.652,12.877 81.335,12.877 81.564,13.106 81.564,14.137 81.812,14.385 82.843,14.385 83.012,14.554 83.012,19.151 82.631,19.532 77.602,19.532 77.449,19.685

## Silkscreen, mask and mechanical layers (free items; w line width, h text height)
Top Solder:
  drawing of 22 lines, arcs and shapes, not listed
Bottom Solder:
  drawing of 18 lines, arcs and shapes, not listed
Mechanical 1:
  the board outline again, w0.013